# Altium PCB plobot_draft.PcbDoc (part 1 of 2)
Units mil, origin at the board's own origin, x right, y up, seen from the top; angles counter-clockwise.
Board outline 3543.53 x 5236.22 mil, 2 copper layers (Top Layer, Bottom Layer); 119 components, 93 nets, 451 pads, 128 vias.
Unrouted connection lines stored in the file: 83.
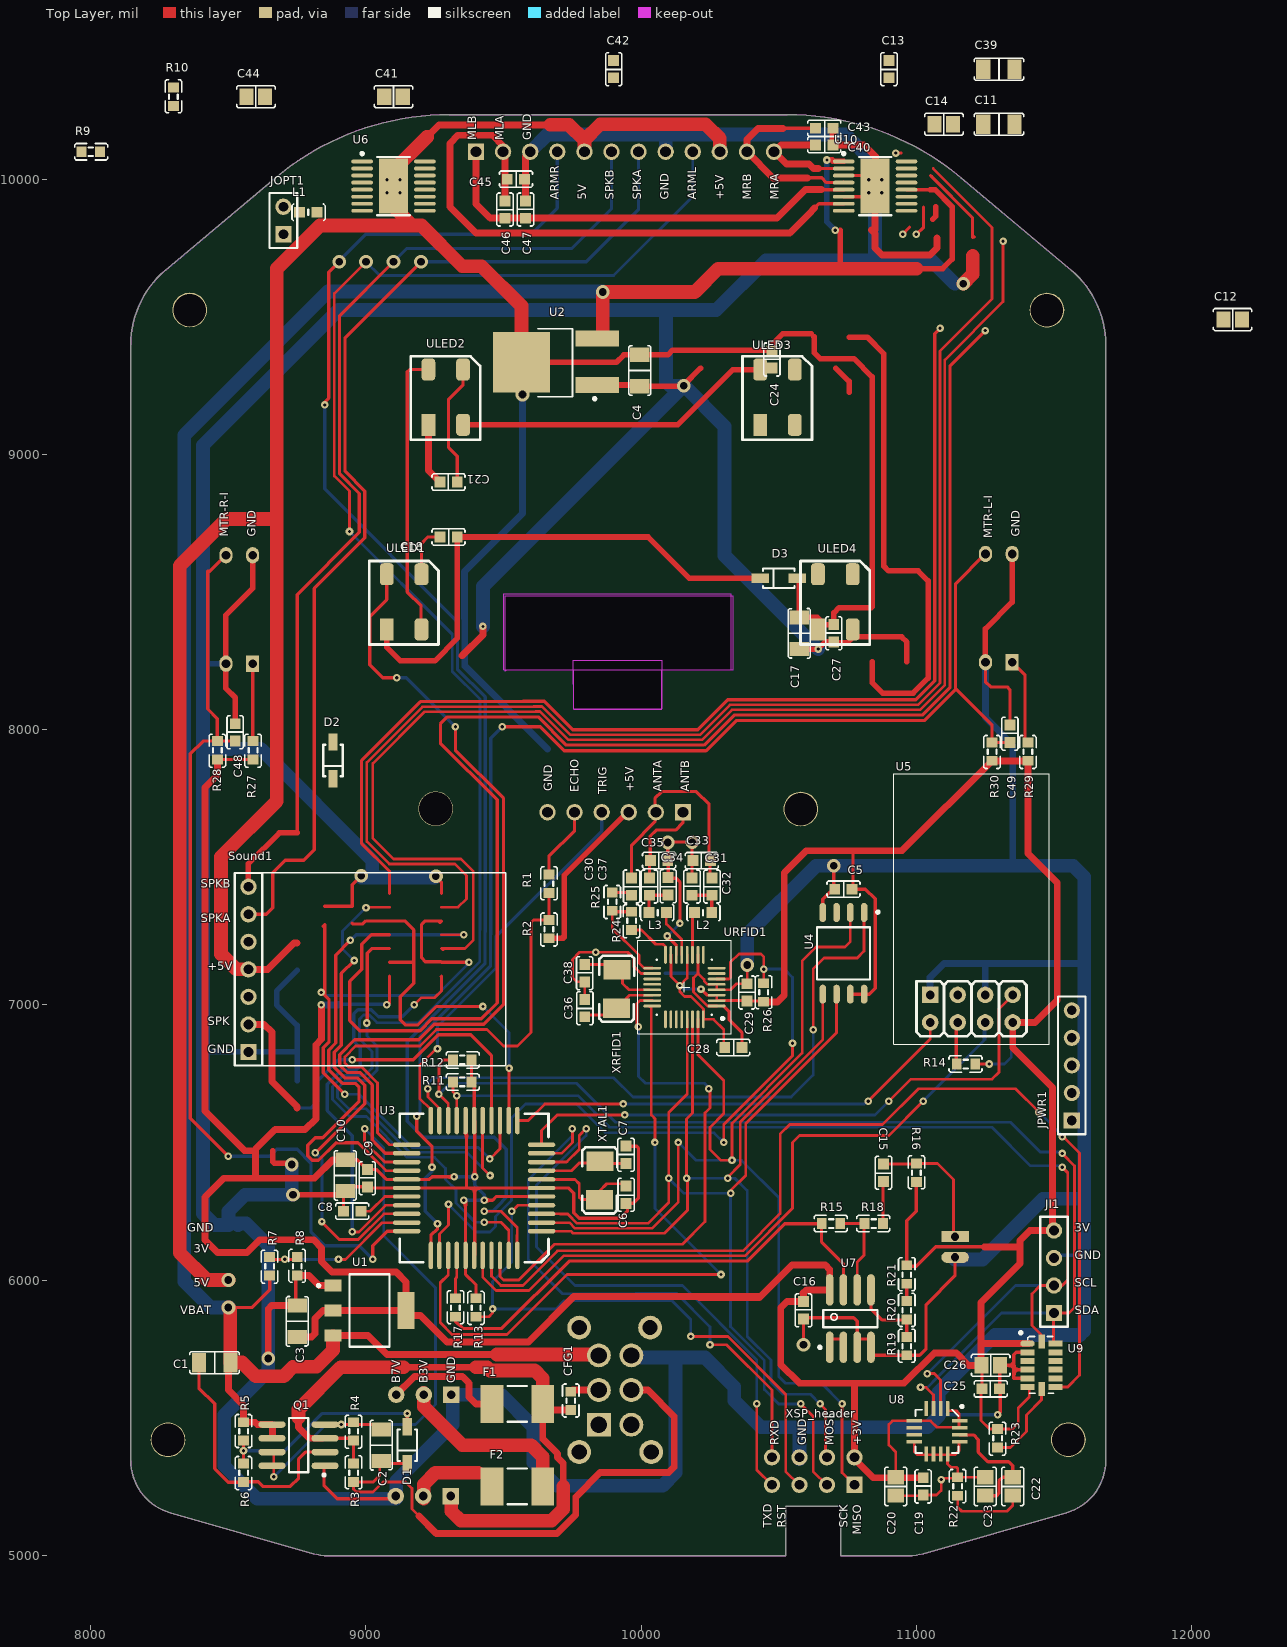
[diagram p0: Top Layer view]
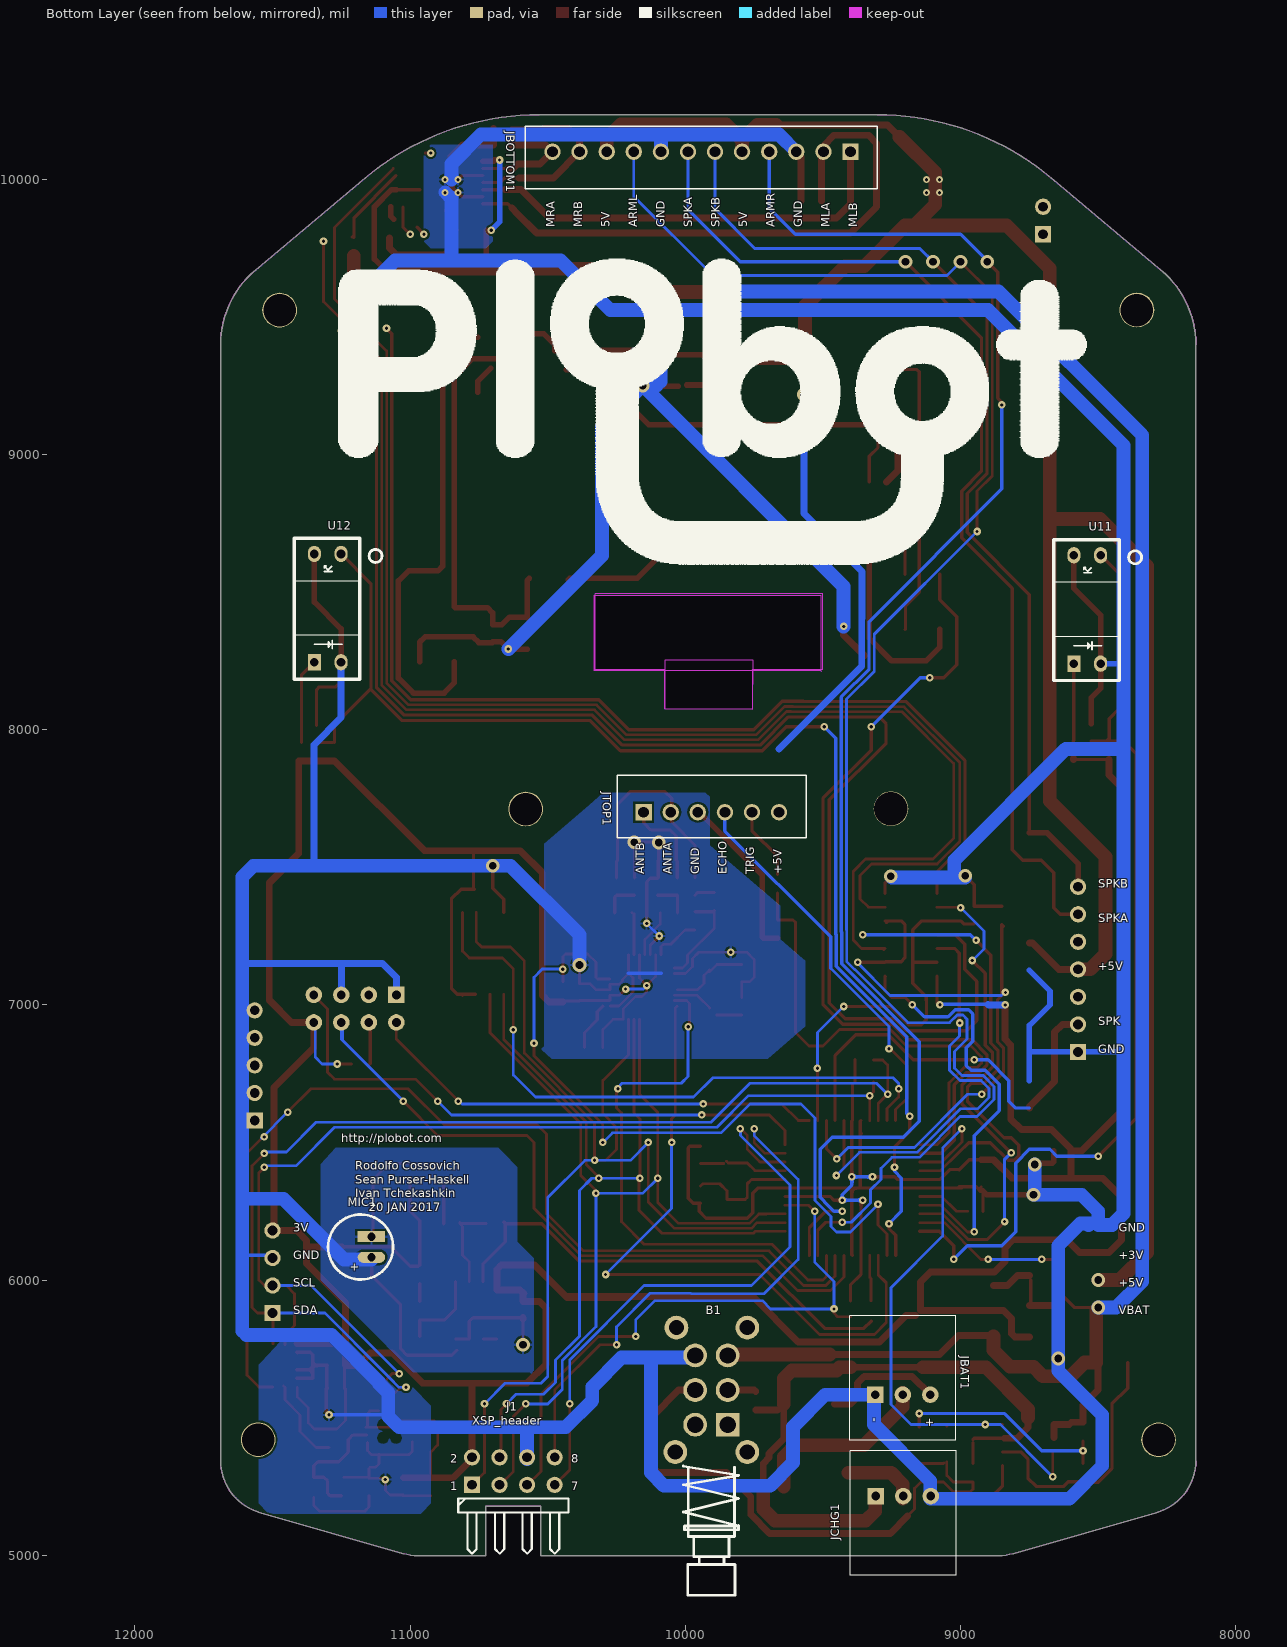
[diagram p1: Bottom Layer view, seen from below]

## Layer stack, top to bottom
Top Layer: signal copper 1.4
Dielectric: dielectric 12.6, FR-4, Dk 4.8
Bottom Layer: signal copper 1.4

## Board outline
8287.99,5154.53 8807.69,5006.05 ccw(c8861.77,5195.33) 8861.77,4998.48 10526,4998.48 10526,5177.5 10725,5177.5 10725,4998.48 10971.98,4998.48 ccw(c10971.98,5195.33) 11026.06,5006.05 11545.76,5154.53 ccw(c11491.68,5343.81) 11688.53,5343.81 11688.53,9398.71 11688.53,9398.7 ccw(c11334.2,9398.7) 11561.96,9670.14 11163.57,10004.43 11163.56,10004.43 ccw(c10530.9,9250.45) 10530.9,10234.7 9302.85,10234.7 ccw(c9302.85,9250.45) 8670.18,10004.43 8271.79,9670.14 ccw(c8499.55,9398.7) 8145.22,9398.7 8145,9398.7 8145,5343.81 8145.22,5343.81 ccw(c8342.07,5343.81)
cut-out: 9754,8253 10075,8253 10075,8075 9755,8074
cut-out: 10332.37,8487.25 10332.37,8215.6 9509.54,8215.6 9505.6,8211.66 9505.6,8487.25

## Design rules (kind name [scope] priority, off if disabled: settings)
Clearance [All] p1: gap=8
FabricationTestpoint [(IsPad And (OnTopLayer Or OnBottomLayer))] p1: side=3 testpointundercomponent=TRUE minsize=40 maxsize=100 preferedsize=60 minholesize=0 maxholesize=40 preferedholesize=32 testpointgrid=1 allowsidetop=TRUE allowsidebottom=TRUE usegrid=TRUE gridtolerance=0.01
HoleSize [All] p1: absolutevalues=TRUE maxlimit=150 minlimit=12 maxpercent=80.000 minpercent=20.000
MinimumSolderMaskSliver [All] p1: minsoldermaskwidth=5
PolygonConnect [All] p1: connectstyle=Relief reliefconductorwidth=10 reliefentries=4 polygonreliefangle="90 Angle"
RoomDefinition audio [InComponentClass('audio')] p1: confinementstyle=ConfineIn formatcopy=TRUE lockcomponents=FALSE outline 11734,5166 11925,5166 11925,5402 11734,5402
RoomDefinition rfid [InComponentClass('rfid')] p2: confinementstyle=ConfineIn formatcopy=TRUE lockcomponents=FALSE outline 7710,4780 12310,4780 12310,10590 7710,10590
RoomDefinition motion [InComponentClass('motion')] p3: confinementstyle=ConfineIn formatcopy=TRUE lockcomponents=FALSE outline 7290,4730 12270,4730 12270,10610 7290,10610
RoomDefinition inout [InComponentClass('inout')] p4: confinementstyle=ConfineIn formatcopy=TRUE lockcomponents=FALSE outline 7340,4790 12250,4790 12250,10510 7340,10510
RoomDefinition cpu [InComponentClass('cpu')] p5: confinementstyle=ConfineIn formatcopy=TRUE lockcomponents=FALSE outline 8210,4575 11590,4575 11590,7880 8210,7880
RoomDefinition connections [InComponentClass('connections')] p6: confinementstyle=ConfineIn formatcopy=TRUE lockcomponents=FALSE outline 8160,4780 11690,4780 11690,10250 8160,10250
RoutingVias [All] p1: holewidth=11.81 width=27.56 viastyle="Through Hole" minholewidth=12 minwidth=24 maxholewidth=28 maxwidth=50
SilkToSilkClearance [All] p1: silktosilkclearance=1
SilkscreenOverComponentPads SilkToSolderMaskClearance [IsPad] p1: minsilkscreentomaskgap=1
SolderMaskExpansion [All] p1: expansion=0
Width [All] p1: maxlimit=1000 minlimit=8 preferedwidth=10
23 further rules are at their usual default settings.

## Classes and differential pairs
component class cpu: C5 C6 C7 C8 C9 C10 J1 R7 R8 R9 R10 R11 R12 R13 R14 R? Sound1 U3 U4 U5 XTAL1
component class rfid: C28 C29 C30 C31 C32 C33 C34 C35 C36 C37 C38 L2 L3 R24 R25 R26 URFID1 XRFID1
component class connections: B1 C1 C2 C3 C4 CFG1 D1 F1 F2 JBAT1 JBOTTOM1 JCHG JCHG1 JI1 Ji2 JOPT1 JPWR1 JTOP JTOP1 Q1 R1 R2 R3 R4 R5 R6 U1 U2
component class motion: B1_1 C11 C12 C13 C14 C40 C43 C45 C46 C47 C48 C49 JSPI R27 R28 R29 R30 U10 U11 U12
component class inout: C17 C18 C19 C20 C21 C22 C23 C24 C25 C26 C27 D3 R22 R23 U8 U9 ULED1 ULED2 ULED3 ULED4 ULED_INNER1 ULED_OUTER2 ULED_OUTER3
component class audio: C15 C16 C39 C41 C42 C44 D2 L1 MIC1 R15 R16 R17 R18 R19 R20 R21 U6 U7

## Components (designator, comment, footprint, x,y, rotation, side; value= is the part's Value field where it differs from the comment)
B1 "PS22F03 non-locked" KGPS22F03 9898.71,5604.03 r0 bottom locked
C1 "10uF" CAPC3216N 8450,5700 r180 top
C2 "1uF" CAPC3216N 9055,5400 r90 top
C3 "10uF" CAPC3216N 8750,5850 r90 top
C4 "10uF" CAPC3216N 9995,9305 r90 top
C5 "100nF" CAPC1608N 10735,7420 r180 top
C6 "18pF" CAPC1608N 9945,6310 r90 top
C7 "18pF" CAPC1608N 9945,6455 r270 top
C8 "100nF" CAPC1608N 8950,6250 r180 top
C9 "100nF" CAPC1608N 9005,6370 r270 top
C10 "10 uF" CAPC3216N 8925,6380 r90 top
C11 "10uF" CAPC3216N 11300,10200 r0 top
C12 "10nF/16V" CAPC2012N 12149,9490 r0 top
C13 "100nF" CAPC1608N 10900,10400 r90 top
C14 "2.2uF" CAPC2012N 11100,10200 r0 top
C15 "100nF" CAPC1608N 10880,6390 r90 top
C16 "100nF" CAPC1608N 10590,5890 r270 top
C17 "10 uF" CAPC3216N 10575,8350 r270 top
C18 "100nF" CAPC1608N 9300,8700 r180 top
C19 "100nF" CAPC1608N 11025,5250 r270 top
C20 "1uF" CAPC2012N 10925,5250 r270 top
C21 "100nF" CAPC1608N 9300,8900 r0 top
C22 "470nF" CAPC2012N 11350,5250 r270 top
C23 "10nF/16V" CAPC2012N 11250,5250 r90 top
C24 "100nF" CAPC1608N 10475,9345 r270 top
C25 "100nF" CAPC1608N 11270,5605 r0 top
C26 "1uF" CAPC2012N 11270,5690 r0 top
C27 "100nF" CAPC1608N 10700,8350 r270 top
C28 "100nF" CAPC1608N 10335,6845 r180 top
C29 "100nF" CAPC1608N 10385,7045 r270 top
C30 "100nF" CAPC1608N 9965,7430 r90 top
C31 "15pF" CAPC1608N 10257,7430 r90 top
C32 "47pF" CAPC1608N 10185,7430 r270 top
C33 "180pF" CAPC1608N 10220,7524 r0 top
C34 "47pF" CAPC1608N 10098,7431 r90 top
C35 "180pF" CAPC1608N 10065,7525 r0 top
C36 "15pF" CAPC1608N 9795,6988 r90 top
C37 "15pF" CAPC1608N 10030,7430 r90 top
C38 "15pF" CAPC1608N 9795,7115 r270 top
C39 "10uF" CAPC3216N 11300,10400 r0 top
C40 "100nF" CAPC1608N 10665,10125 r180 top
C41 "10nF/16V" CAPC2012N 9100,10300 r0 top
C42 "100nF" CAPC1608N 9900,10400 r90 top
C43 "100nF" CAPC1608N 10665,10185 r180 top
C44 "2.2uF" CAPC2012N 8600,10300 r0 top
C45 "100nF" CAPC1608N 9545,10000 r180 top
C46 "100nF" CAPC1608N 9505,9890 r90 top
C47 "100nF" CAPC1608N 9580,9890 r270 top
C48 "100nF" CAPC1608N 8525,7990 r270 top
C49 "100nF" CAPC1608N 11340,7985 r270 top
CFG1 "NC" RESC1608N 9744.09,5561.02 r90 top
D1 "MBR0540" SOD123/X.85 9150,5400 r90 top
D2 "CDZVT2R3.3B" SOD123/X.85 8880,7888 r90 top
D3 "MBR0540" SOD123/X.85 10500,8550 r0 top
F1 "miniSMDC260F/12" miniSMDC260F/12 9550,5550 r0 top
F2 "miniSMDC260F/12" miniSMDC260F/12 9550,5250 r180 top
J1 "XSP" HDR2X4H 10775,5255.85 r180 bottom locked
JBAT1 "Charger" S3B-XH-A(LF)(SN) 9210,5800 r270 bottom locked
JBOTTOM1 "Header 12" JST-B12B-XH 9400,10100 r0 bottom locked
JCHG1 "Charger" "S3B-XH-A( FEMALE )" 9208,4998.48 r90 bottom
JI1 "Header 4" HDR1X4 11500,5880 r90 top
JOPT1 "Header 2" HDR1X2 8700,9800 r90 top
JPWR1 "Component" HDR1X5 11565,6580 r90 top
JTOP1 "w/lock" JST-B6B-XH 10151.73,7700 r180 bottom locked
L1 "Inductor" INDC1608N 8790,9880 r0 top
L2 "2.2uH" INDC1608N 10225,7335 r0 top
L3 "2.2uH" INDC1608N 10060,7335 r180 top
MIC1 "Mic2" electret_6mm 11180,6120 r270 bottom
Q1 "IRF7319" SO-8_L 8755,5400 r180 top
R1 "10k" RESC1608N 9665,7440 r90 top
R2 "10K" RESC1608N 9665,7275 r270 top
R3 "10K" RESC1608N 8955,5300 r90 top
R4 "100K" RESC1608N 8955,5450 r270 top
R5 "100K" RESC1608N 8555,5450 r90 top
R6 "300K" RESC1608N 8555,5300 r270 top
R7 "20k" RESC1608N 8650,6050 r270 top
R8 "10k" RESC1608N 8750,6050 r90 top
R9 "10k" RESC1608N 8000,10100 r0 top
R10 "10k" RESC1608N 8300,10300 r90 top
R11 "10k" RESC1608N 9350,6720 r0 top
R12 "10k" RESC1608N 9350,6800 r0 top
R13 "10k" RESC1608N 9400,5900 r270 top
R14 "10k" RESC1608N 11180,6785 r180 top
R15 "100k" RESC1608N 10690,6205 r180 top
R16 "3.3k" RESC1608N 11000,6390 r90 top
R17 "10k" RESC1608N 9325,5900 r90 top
R18 "22" RESC1608N 10845,6205 r180 top
R19 "10k" RESC1608N 10965,5760 r90 top
R20 "10k" RESC1608N 10965,5890 r90 top
R21 "10k" RESC1608N 10965,6020 r90 top
R22 "10k" RESC1608N 11150,5250 r90 top
R23 "10k" RESC1608N 11295,5425 r270 top
R24 "820" RESC1608N 9965,7305 r270 top
R25 "5.1k" RESC1608N 9895,7375 r270 top
R26 "10k" RESC1608N 10445,7045 r90 top
R27 "1K" RESC1608N 8590,7925 r270 top
R28 "5.1k" RESC1608N 8460,7925 r270 top
R29 "1K" RESC1608N 11405,7920 r270 top
R30 "5.1k" RESC1608N 11275,7920 r270 top
Sound1 "MP3 - M3A3" MP3 8573,6829 r90 top
U1 "AZ1117CH-3.3" SOT223 9000,5900 r180 top
U2 "AZ1084CD-5.0" AZ1084CD-5.0 9675.24,9335 r180 top
U3 "MCU" atmega644p 9355,6345 r270 top locked
U4 "W25Q64BVSIG" W25Q64BVSIG 10730,7190 r270 top
U5 "ESP8266" ESP8266 11141,6986 r90 top
U6 "DRV8833" DRV8833 9100,9975 r0 top
U7 "LM358D" LM358D 10760,5860 r90 top
U8 "L3G4200D" LGA16-4X4 11075,5450 r270 top
U9 "ADXL345BCCZ" ADXL345 11455,5690 r0 top
U10 "DRV8833" DRV8833 10850,9975 r0 top
U11 "ITR9608" ITR9608 8562.62,8409.71 r180 bottom
U12 "ITR9608" ITR9608 11322.62,8414.71 r180 bottom
ULED1 "WS2812B" WS2812B 9141.85,8463.08 r90 top locked
ULED2 "WS2812B" WS2812B 9292.85,9206.86 r90 top locked
ULED3 "WS2812B" WS2812B 10498.44,9206.85 r90 top locked
ULED4 "WS2812B" WS2812B 10708.44,8463.08 r90 top locked
URFID1 "MFRC52202HN1" MFRC52202HN1 10157.13,7064.53 r180 top locked
XRFID1 "7A-27.120MAAJ-T" XTAL 9925,7055 r90 top
XTAL1 "ABM7-8.000MHZ-D2Y-T" XTAL 9863,6359 r90 top

## Footprints (in the part's own frame and the unit in brackets; to place one, negate y for a bottom-side part, rotate by r counter-clockwise, add the part's x,y. Pads: shape width x height; smd on the part's side, far side on the other; paste and mask are expansions set on the pad)
ADXL345 [mm] "BGA, 14-Leads, Body 5.0x3.0mm,  Pitch 0.80mm"
  oct 1.3x0.55 smd: 1(-1.3,2)
  rect 1.3x0.55 smd: 2(-1.3,1.2) 3(-1.3,0.4) 4(-1.3,-0.4) 5(-1.3,-1.2) 6(-1.3,-2) 8(1.3,-2) 9(1.3,-1.2) 10(1.3,-0.4) 11(1.3,0.4) 12(1.3,1.2) 13(1.3,2)
  rect 0.6x1.3 smd: 7(0,-2.2) 14(0,2.2)
  silkscreen extent -2.05,-2.59 1.12,3.12, body extent -1.5,-2.5 1.5,2.5, height 1
atmega644p [mil]
  oval 16x100 smd: 1(167.45,282.95) 2(136.45,282.95) 3(104.45,282.95) 4(73.45,282.95) 5(41.45,282.95) 6(10.45,282.95) 7(-20.55,282.95) 8(-52.55,282.95) 9(-83.55,282.95) 10(-115.55,282.95) 11(-146.55,282.95) 23(-146.55,-207.05) 24(-115.55,-207.05) 25(-83.55,-207.05) 26(-52.55,-207.05) 27(-20.55,-207.05) 28(10.45,-207.05) 29(41.45,-207.05) 30(73.45,-207.05) 31(104.45,-207.05) 32(136.45,-207.05) 33(167.45,-207.05)
  oval 100x16 smd: 12(-234.55,194.95) 13(-234.55,163.95) 14(-234.55,131.95) 15(-234.55,100.95) 16(-234.55,68.95) 17(-234.55,37.95) 18(-234.55,6.95) 19(-234.55,-25.05) 20(-234.55,-56.05) 21(-234.55,-88.05) 22(-234.55,-119.05) 34(255.45,-119.05) 35(255.45,-88.05) 36(255.45,-56.05) 37(255.45,-25.05) 38(255.45,6.95) 39(255.45,37.95) 40(255.45,68.95) 41(255.45,100.95) 42(255.45,131.95) 43(255.45,163.95) 44(255.45,194.95)
  silkscreen extent -260,-232 280,308, body extent -183,-162 227,244, height 39
AZ1084CD-5.0 [mm] "D-PAK, 3-Pads, Body 6.2x6.7mm (max), IPC Low Density"
  rect 4x1.5 smd: 1(-4.2,2.1) 3(-4.2,-2.2)
  rect 5.25x5.6 smd: 2(2.8,0)
  silkscreen extent -4.08,-3.1 1.27,3.49, body extent -3.61,-3.3 2.59,3.3, height 2.38
CAPC1608N [mm]
  rect 1x1 smd: 1(-0.8,0) 2(0.8,0)
  silkscreen extent -1.52,-0.76 1.52,0.75, body extent -0.87,-0.48 0.87,0.48, height 0.85
CAPC2012N [mm]
  rect 1.3x1.5 smd: 1(-0.85,0) 2(0.85,0)
  silkscreen extent -1.78,-1.02 1.78,1.02, body extent -1.1,-0.72 1.1,0.72, height 1.1
CAPC3216N [mm] "Chip Capacitor, Body 3.2x1.6mm, IPC Medium Density"
  rect 1.3x1.8 smd: 1(-1.45,0) 2(1.45,0)
  silkscreen extent -2.29,-1.02 2.29,1.02, body extent -1.7,-0.9 1.7,0.9, height 1.35
DRV8833 [mm]
  oval 2x0.35 smd: 1(-2.9,2.275) 2(-2.9,1.625) 3(-2.9,0.975) 4(-2.9,0.325) 5(-2.9,-0.325) 6(-2.9,-0.975) 7(-2.9,-1.625) 8(-2.9,-2.275) 9(2.9,-2.275) 10(2.9,-1.625) 11(2.9,-0.975) 12(2.9,-0.325) 13(2.9,0.325) 14(2.9,0.975) 15(2.9,1.625) 16(2.9,2.275)
  rect 2.7x5.08 smd: PP(0,0)
  silkscreen extent -3.02,-2.69 1.51,3.12, body extent -2.25,-2.55 2.25,2.55, height 1.2
electret_6mm [mil]
  oval 40x100 hole 30: 1(37.4,39.37)
  rect 40x100 hole 30: 2(-37.4,39.37)
  silkscreen extent -118,-118 118,118
ESP8266 [mil]
  round 60 hole 32: CH_PD(-49.94,-9.12) GPIO0(50.06,-109.12) GPIO2(50.06,-9.12) RST(-49.94,-109.12) RXD(50.06,-209.12) TXD(-49.94,90.88) VCC(-49.94,-209.12)
  rect 60x60 hole 32: GND(50.06,90.88)
  silkscreen extent -130,-341 854,224, body extent -125,-340 845,230, height 164
HDR1X2 [mm] "Connector; Header; 2 Position"
  rect 1.5x1.5 hole 0.9: 1(0,0)
  round 1.5 hole 0.9: 2(2.54,0)
  silkscreen extent -1.27,-1.27 3.81,1.27
HDR1X4 [mm] "Connector; Header; 4 Position"
  rect 1.5x1.5 hole 0.9: 1(0,0)
  round 1.5 hole 0.9: 2(2.54,0) 3(5.08,0) 4(7.62,0)
  silkscreen extent -1.27,-1.27 8.89,1.27, body extent -1.27,-1.27 8.89,1.27, height 4
HDR1X5 [mm] "Connector; Header; 5 Position"
  rect 1.5x1.5 hole 0.9: 1(0,0)
  round 1.5 hole 0.9: 2(2.54,0) 3(5.08,0) 4(7.62,0) 5(10.16,0)
  silkscreen extent -1.27,-1.27 11.43,1.27
HDR2X4H [mm] "Connector; Header; 4x2 Position; Right Angle"
  rect 1.5x1.5 hole 0.9: 1(0,0)
  round 1.5 hole 0.9: 2(0,2.54) 3(2.54,0) 4(2.54,2.54) 5(5.08,0) 6(5.08,2.54) 7(7.62,0) 8(7.62,2.54)
  silkscreen extent -1.27,-6.35 8.89,-1.27, body extent -0.64,-5.94 8.25,3.81, height 5
INDC1608N [mm]
  rect 1x1 smd: 1(-0.8,0) 2(0.8,0)
  silkscreen extent -1.49,-0.76 1.56,0.76, body extent -0.87,-0.48 0.87,0.48, height 0.71
ITR9608 [mm]
  rect 1.2x1.5 hole 0.8: 1(-0.651,-4.316)
  oval 1.2x1.5 hole 0.8: 2(1.816,-4.316) 3(1.816,5.684) 4(-0.651,5.684)
  silkscreen extent -2.5,-5.87 5.6,7.13, body extent -2.42,-5.82 3.58,7.18, height 10
JST-B6B-XH [mm]
  rect 1.508x1.508 hole 1 mask-25.4: 1(0,0)
  round 1.508 hole 1 mask-25.4: 2(2.5,0) 3(5,0) 4(7.5,0) 5(10,0) 6(12.5,0)
  silkscreen extent -2.45,-2.35 15,3.4, body extent -2.27,-2.25 14.75,3.27, height 4
JST-B12B-XH [mm]
  rect 1.508x1.508 hole 1 mask-25.4: 1(0,0)
  round 1.508 hole 1 mask-25.4: 2(2.5,0) 3(5,0) 4(7.5,0) 5(10,0) 6(12.5,0) 7(15,0) 8(17.5,0) 9(20,0) 10(22.5,0) 11(25,0) 12(27.5,0)
  silkscreen extent -2.45,-2.35 30,3.4, body extent -2.27,-2.25 29.75,3.27, height 4
KGPS22F03 [mm]
  round 2.2 hole 1.4: 0(-3.146,-5.666) 0(-3.146,5.814) 0(3.399,-5.666) 0(3.5,5.814)
  rect 2.2x2.2 hole 1.5: 1(-1.334,3.296)
  round 2.2 hole 1.5: 2(-1.334,0.096) 3(-1.334,-3.104) 4(1.666,-3.104) 5(1.666,0.096) 6(1.666,3.296)
  silkscreen extent -2.32,7.12 2.76,19.04, body extent -3.15,-5.7 3.5,19, height 9
LGA16-4X4 [mm]
  rrect50% 1.4x0.325 smd: 1(-2.1,0.975)
  rect 1.4x0.325 smd paste-25.4: 2(-2.1,0.325) 3(-2.1,-0.325) 4(-2.1,-0.975) 9(2.1,-0.975) 10(2.1,-0.325) 11(2.1,0.325) 12(2.1,0.975)
  rect 0.325x1.4 smd paste-25.4: 5(-0.975,-2.1) 6(-0.325,-2.1) 7(0.325,-2.1) 8(0.975,-2.1) 13(0.975,2.1) 14(0.325,2.1) 15(-0.325,2.1) 16(-0.975,2.1)
  silkscreen extent -2.42,-2 2,2.42, body extent -1.5,-1.5 1.5,1.5, height 0.5
LM358D [mm] "SOIC, 8-Leads, Body 5.0x4.0mm (max), Pitch 1.27mm, IPC Low Density"
  oval 2.9x0.7 smd: 1(-2.65,1.905) 2(-2.65,0.635) 3(-2.65,-0.635) 4(-2.65,-1.905) 5(2.65,-1.905) 6(2.65,-0.635) 7(2.65,0.635) 8(2.65,1.905)
  silkscreen extent -2.77,-2.5 0.8,2.93, body extent -2,-2.5 2,2.5, height 1.75
MFRC52202HN1 [mm] "QFN, 32-Leads, Body 5.1x5.1mm (max), Pitch 0.50mm, IPC Low Density"
  oval 1.65x0.25 smd: 1(-2.975,1.75) 2(-2.975,1.25) 3(-2.975,0.75) 4(-2.975,0.25) 5(-2.975,-0.25) 6(-2.975,-0.75) 7(-2.975,-1.25) 8(-2.975,-1.75) 17(2.975,-1.75) 18(2.975,-1.25) 19(2.975,-0.75) 20(2.975,-0.25) 21(2.975,0.25) 22(2.975,0.75) 23(2.975,1.25) 24(2.975,1.75)
  oval 0.25x1.65 smd: 9(-1.75,-2.975) 10(-1.25,-2.975) 11(-0.75,-2.975) 12(-0.25,-2.975) 13(0.25,-2.975) 14(0.75,-2.975) 15(1.25,-2.975) 16(1.75,-2.975) 25(1.75,2.975) 26(1.25,2.975) 27(0.75,2.975) 28(0.25,2.975) 29(-0.25,2.975) 30(-0.75,2.975) 31(-1.25,2.975) 32(-1.75,2.975)
  silkscreen extent -4.3,-4.3 4.3,4.3
miniSMDC260F/12 [mm] "Chip Capacitor, 2-Leads, Body 5.3x3.2mm, IPC Low Density"
  rect 2.1x3.5 smd: 1(-2.35,0) 2(2.35,0)
  silkscreen extent -0.9,-1.65 0.9,1.65, body extent -2.75,-1.71 2.75,1.7, height 1.52
MP3 [mm] "Connector; Header; 7 Position"
  rect 1.5x1.5 hole 0.9: 1(0,0)
  round 1.5 hole 0.9: 2(2.54,0) 3(5.08,0) 4(7.62,0) 5(10.16,0) 6(12.7,0) 7(15.24,0)
  silkscreen extent -1.27,-23.75 16.52,1.27, body extent -1.27,-23.5 16.51,1, height 4.5
RESC1608N [mm]
  rect 0.9x1 smd: 1(-0.85,0) 2(0.85,0)
  silkscreen extent -1.49,-0.76 1.56,0.76, body extent -0.85,-0.48 0.85,0.48, height 0.6
"S3B-XH-A( FEMALE )" [mil]
  rect 60x60 hole 32: 1(216.54,100)
  round 60 hole 32: 2(216.54,0) 3(216.54,-100)
  silkscreen extent -71,-193 382,193, body extent -75,-175 350,175, height 157
S3B-XH-A(LF)(SN) [mil]
  rect 60x60 hole 32: 1(216.54,-100)
  round 60 hole 32: 2(216.54,0) 3(216.54,100)
  silkscreen extent -71,-193 382,193, body extent -75,-175 350,175, height 157
SO-8_L [mm] "SOIC, 8-Leads, Body 4.9x3.9mm, Pitch 1.27mm, IPC High Density"
  oval 2.5x0.6 smd: 1(-2.45,1.905) 2(-2.45,0.635) 3(-2.45,-0.635) 4(-2.45,-1.905) 5(2.45,-1.905) 6(2.45,-0.635) 7(2.45,0.635) 8(2.45,1.905)
  silkscreen extent -2.48,-2.5 0.89,2.88, body extent -2,-2.5 2,2.5, height 1.75
SOD123/X.85 [mm] "SOD-123; 2 Leads; Body 2.7 x 1.6 mm, (LxW)"
  rect 1.6x0.85 smd: 1(-1.7,0) 2(1.7,0)
  silkscreen extent -1.45,-0.9 1.45,0.9, body extent -1.3,-0.56 1.07,0.53, height 0.53
SOT223 [mm]
  rect 1.55x1.1 smd: 1(3.045,-2.031) 2(3.045,0.269) 3(3.045,2.569)
  rect 1.55x3.45 smd: 2(-3.705,0.269)
  silkscreen extent -2.18,-3.08 4.49,3.62, body extent -2.11,-3.01 1.49,3.59, height 4
W25Q64BVSIG [mm]
  oval 1.75x0.6 smd: 1(-3.697,2.033) 2(-3.697,0.763) 3(-3.697,-0.507) 4(-3.697,-1.777) 5(3.839,-1.777) 6(3.839,-0.507) 7(3.839,0.763) 8(3.839,2.033)
  silkscreen extent -3.86,-2.32 2.48,3.43, body extent -2.29,-2.34 2.51,2.52, height 0.8
WS2812B [mil]
  rect 80x50 smd: 1(-99.17,66.06)
  rrect50% 80x50 smd: 2(-99.17,-59.92) 3(101.62,-59.92) 4(101.62,66.06)
  silkscreen extent -154,-122 150,130, body extent -99,-95 98,101, height 30
XTAL [mm]
  rect 1.8x2.5 smd: 1(1.834,0.329) 2(-1.691,0.354)
  silkscreen extent -2.97,-1.27 3.13,1.95, body extent -2.2,-0.89 2.49,1.4, height 2.54

## Part data
B1: library part Component_1
C1 C2 C3 C4 C10 C11 C17 C20 C22 C23 C26 C39: library part Cap_2, "Capacitor"
C5 C6 C7 C8 C9 C12 C13 C14 C15 C16 C18 C19 C21 C24 C25 C27 C28 C29 C30 C31 C32 C33 C34 C35 C36 C37 C38 C40 C41 C42 C43 C44 C45 C46 C47 C48 C49: library part Cap, "Capacitor"
CFG1 R1 R2 R3 R4 R5 R6 R7 R8 R9 R10 R11 R12 R13 R14 R15 R16 R17 R18 R19 R20 R21 R22 R23 R24 R25 R26 R27 R28 R29 R30: library part Res2, "Resistor"
D1 D2 D3: library part Diode, "Default Diode"
F1 F2: library part "Fuse Thermal", "Thermal Fuse"
J1: library part "Header 4X2H", "Header, 4-Pin, Dual row, Right Angle"
JBAT1 JCHG1: library part BATTCON
JBOTTOM1: "Header, 12-Pin"
JI1: "Header, 4-Pin"
JOPT1: "Header, 2-Pin"
JPWR1: library part "Header 5", "Header, 5-Pin"
JTOP1: library part "Header 6", "Header, 6-Pin"
L2 L3: library part Inductor, "Inductor"
MIC1: "Microphone"
Q1: "HEXFET Power MOSFET"
Sound1: library part "Header 7", "Header, 7-Pin"
U1: library part LM1117
U3: library part ATmega644-20AU, "8-bit AVR Microcontroller, 2.7-5.5V, 20MHz, 64KB Flash, 2KB EEPROM, 4KB SRAM, 44-pin TQFP"
U7: "Dual Operational Amplifier"
U8: "L3G4200D Series 2.4 - 3.6 V Three-axis Angular Rate MEMS Motion Sensor - LGA-16"
U9: library part ADXL345
XRFID1: library part Tm08B.S01_12M_42

## Free pads (board coordinates)
  round 125.98 hole 118.11 unplated: 7(8280.6,5419.13) 8(11552.53,5420.01) 9(11474.54,9524.56) 10(8359.1,9524.83) 12(10580.26,7711.48)
  round 125.98 hole 122.05 unplated: 11(9252.95,7712.6)

## Via types
v1: diameter 27.56, hole 12, Top Layer to Bottom Layer, 99 vias
v2: diameter 50, hole 28, Top Layer to Bottom Layer, 20 vias
v3: diameter 25.98, hole 12, Top Layer to Bottom Layer, 8 vias
v4: diameter 27.6, hole 12, Top Layer to Bottom Layer, 1 vias

## Nets (pads, with @x,y where several pads share a name; then routed paths per layer and width w, separated by ;. In a path a pad name is that pad's centre, name@x,y a point inside that pad or via, vN(x,y) a via of type N, cw(c..) or ccw(c..) an arc to the next point about the centre after c; other vN are vias at no path point)
ANT-A: C30.2 C31.2 C33.2 JTOP1.2 | length 827.6
  Top Layer w12: C30.2@9965,7461.5 9965,7565 9965,7580 10050,7665 JTOP1.2@10050,7696.7 ; C31.2@10250,7461.5 10250,7521.5 10246.5,7525 10246.5,7728.5 10200,7775 10075,7775 10050,7750 JTOP1.2@10050,7703.3 ; JTOP1.2@10050,7696.7 JTOP1.2@10050,7703.3 ; JTOP1.2@10050,7696.7 JTOP1.2@10053.3,7700 JTOP1.2@10050,7703.3
ANT-B: C35.1 C37.2 JTOP1.1 | length 325
  Top Layer w12: C37.2@10030,7461.5 C35.1@10030,7521.5 ; C35.1@10033.5,7525 10033.5,7613.5 10055,7635 10125,7635 10151.73,7661.73 JTOP1.1@10151.73,7700
AXL-INT: U9.8 | length 3708.7
  Top Layer w10: 9455.95,6089.55 9455.95,6014.05 9490,5980 9570,5980 9696,6106 10369.67,6106 10505,6241.33 10505,6530 10540,6565 10877.13,6565 11007.13,6695 11360,6695 v1(11445,6610) ; U9.8@11498.31,5611.26 11550,5611.26 11593,5654.26 11593,6462 v1@11540,6515
  Bottom Layer w10: v1(11445,6610) v1@11540,6515
  other v1: 11530,6520
BATT_3.7V: F2.2 JCHG1.2 | length 265.8
  Top Layer w50: JCHG1.2@9210,5206.54 9210,5257 9253,5300 9407.48,5300
BATT_LVL: R7.1 R8.2 U3.32 | length 601.8
  Top Layer w10: R7.1@8641.54,6083.46 R7.1@8650,6075 ; R7.1@8660,6075 v1(8705,6075) R8.2@8751.54,6075 ; v1(8900,6075) 8925.46,6075 9059.01,6208.55 U3.32@9147.95,6208.55
  Bottom Layer w10: v1(8705,6075) v1(8900,6075)
CS_FLASH: U3.21 U4.1 | length 2360.7
  Top Layer w10: v1(9225,6695) 9225,6665 9266.95,6623.05 U3.21@9266.95,6579.55 ; v1(10625,6910) 10625,7130 10665,7170 10785,7170 10810.04,7195.04 U4.1@10810.04,7335.54
  Bottom Layer w10: v1(9225,6695) 9225,6715 9245,6735 9900,6735 9970,6665 10545,6665 10625,6745 v1(10625,6910)
DBG: JPWR1.4 U3.36
ECHO: R1.1 R2.1 U3.23 | length 1806.4
  Top Layer w10: U3.23@9147.95,6491.55 9085.45,6491.55 9041.78,6535.22 9041.78,6716.66 8985.22,6773.22 8938.91,6773.22 8923.22,6788.91 8923.22,6811.09 8962.44,6850.31 9195.75,6850.31 9255.61,6910.17 9439.83,6910.17 9500,6850 9550,6850 9600,6900 9600,7300 9608.46,7308.46 R2.1@9665,7308.46 R1.1@9665,7406.54
GND: B1.4 C3.2 C4.1 C5.2 C6.1 C7.1 C8.2 C9.2 C10.1 C11.1 C12.1 C14.1 C16.2 C17.2 C18.2 C19.2 C20.2 C21.2 C23.2 C24.2 C25.2 C26.2 C27.2 C28.1 C29.1 C32.1 C33.1 C34.2 C35.2 C36.2 C38.2 C39.1 C40.1 C41.1 C43.1 C44.1 C45.1 C47.1 C48.1 C49.1 D2.2 J1.6 JBAT1.1 JBOTTOM1.3 JBOTTOM1.8 JCHG1.1 JI1.1 JPWR1.5 JTOP1.6 MIC1.2 Q1.1 R2.2 R8.1 R9.1 R10.1 R19.1 R22.2 Sound1.1 U1.1 U2.1 U3.6 U3.18 U3.28 U3.39 U4.4 U5.GND U5.GPIO0 U6.3 U6.6 U6.13 U6.PP U7.4 U7.5 U8.8 U8.9 U8.10 U8.11 U8.12 U8.13 U9.2 U9.4 U9.5 U10.3 U10.6 U10.13 U10.PP U11.2 U11.4 U12.2 U12.4 ULED1.3 ULED2.3 ULED3.3 ULED4.3 URFID1.1 URFID1.4 URFID1.5 URFID1.10 URFID1.14 URFID1.18 | length 37026.7
  Top Layer w10: C10.1@8925,6338.5 C10.1@8928.5,6335 ; C36.2@9795,7026.5 C38.2@9795,7083.5 9766.5,7083.5 9750,7100 9750,7165 9776,7191 9951.28,7191 9974.26,7168.02 9974.26,7138.74 9999.26,7113.74 URFID1.18@10040,7113.74 ; URFID1.14@10127.6,7181.65 10127.6,7217.4 ; URFID1.10@10206.34,7181.65 10206.34,7114.53 10190,7098.19 10190,7046.66 10241.03,6995.63 URFID1.1@10274.25,6995.63 ; 10206.73,7114.13 10228.77,7092.09 10228.77,7086.63 10241.03,7074.37 URFID1.5@10274.25,7074.37 URFID1.4@10274.25,7054.69 10325,7054.69 10346.81,7076.5 C29.1@10385,7076.5 v2(10385,7145) ; C20.2@10925,5216.54 C19.2@11028.46,5216.54 ; U8.8@10992.32,5411.61 10992.32,5377.68 11005,5365 11087.8,5365 U8.12@11113.39,5365 ; C19.2@11025,5218.5 11073.5,5218.5 11090,5235 11090,5270 11100,5280 R22.2@11150,5280 ; U8.12@11113.39,5367.32 U8.12@11113.39,5365 ; U8.13@11155,5410 11155,5380 11140,5365 U8.12@11113.39,5365 ; C23.2@11241.54,5283.46 R22.2@11150,5283.46 11150,5315 11145,5320 11125,5320 11113.39,5331.61 U8.12@11113.39,5365
  Top Layer w12: C3.2@8745,5905 8745,5907.09 R8.1@8745,6000 ; Q1.1@8847.52,5325 8847.52,5252.48 8895,5205 9110,5205 ; 8850,7358.46 8950,7358.46 8950,7436 v2(8983,7469) ; C8.2@8918.5,6250 C10.1@8918.5,6322.91 ; C10.1@8926.46,6321.46 8943.5,6338.5 C9.2@9005,6338.5 ; C9.2@8995.45,6334.55 U3.28@9147.95,6334.55 9215,6334.55 9365,6334.55 ; ULED1.3@9201.77,8564.69 9201.77,8673.23 9200,8675 9225,8700 C18.2@9268.5,8700 ; v2@9252.54,7465.54 9274.49,7443.58 9274.49,7405 ; C21.2@9331.5,8900 9331.5,8993.5 9300,9025 9300,9200 9352.77,9252.77 ULED2.3@9352.77,9308.47 ; U3.18@9361.95,6579.55 9365,6576.5 9365,6334.55 ; U3.39@9392.95,6089.55 9395,6091.6 9395,6334.55 ; C7.1@9945,6486.5 9983.5,6486.5 9990,6480 9990,6297.01 9971.5,6278.5 C6.1@9945,6278.5 9950,6273.5 9950,6250 9925,6225 9775,6225 9755,6245 9755,6285.04 9755,6315 9735.45,6334.55 U3.6@9637.95,6334.55 9395,6334.55 ; v1(10095,7250) 10127.6,7217.4 ; C34.2@10100,7461.5 C34.2@10100,7462.5 ; v1(10140.81,7295.81) 10140.81,7419.69 10140.81,7446.72 10127.53,7460 10100.5,7460 C34.2@10098,7462.5 10098,7523.5 C35.2@10096.5,7525 v2(10096.5,7590.24) 10095,7591.73 10185,7591.73 C32.1@10185,7461.5 C32.1@10183.5,7462.99 ; URFID1.1@10300,6995 10320,6975 10320,6950 10320,6945 10366.5,6898.5 C28.1@10366.5,6845 ; v2(10590,5765) C16.2@10590,5858.5 ; C16.2@10590,5863.26 10771.74,5863.26 10785,5850 10785,5785.67 U7.4@10835,5785.67 ; U4.4@10660.04,7335.54 10660.04,7383.54 10700,7423.5 v2(10700,7505) ; U10.6@10735.83,9936.61 10811.61,9936.61 U10.PP@10850,9975 10811.61,10013.39 U10.3@10735.83,10013.39 ; U7.4@10830,5745 10848.46,5726.54 R19.1@10965,5726.54 11011.54,5726.54 11035,5750 11035,5910 11140,6015 11140,6080 ; U10.PP@10870,9885 U10.PP@10870.43,9885.43 ; U12.2@11251.12,8244.77 11251.12,8173.88 11270,8155 11330,8155 11340,8145 C49.1@11340,8016.5 ; C25.2@11300,5610 11303.25,5606.75 11305,5605 11305,5520 ; C26.2@11300,5690 C26.2@11303.46,5690 ; C25.2@11301.5,5605 11303.46,5606.97 C26.2@11303.46,5690 ; U9.2@11409.45,5735 11411.69,5737.24 11362.24,5737.24 11354.25,5729.25 11354.25,5690 ; U9.5@11411.69,5642.76 11354.25,5642.76 11354.25,5674.25 ; U9.4@11411.69,5674.25 11354.25,5674.25 ; 9365,6334.55 9395,6334.55 ; C26.2@11303.46,5690 11354.25,5690 ; 11354.25,5674.25 11354.25,5690
  Top Layer w20: C48.1@8525,8021.5 8525,8116.12 8491.12,8150 U11.2@8491.12,8239.77 8491.12,8416.12 8588.25,8513.25 U11.4@8588.25,8633.47 ; 8661.5,6470 8661.5,6429.5 8666.24,6424.76 8725.24,6424.76 v2(8730,6420) ; v2(8735,6310) 8905,6310 C10.1@8920,6325 ; R2.2@9665,7241.54 9716.54,7241.54 9720,7245 ; 9715,7245 9720,7250 9720,7470 9940,7690 9940,7700 9940.39,7700.39 9945,7705 ; U2.1@9860.35,9252.32 C4.1@9995,9252.32 ; C4.1@10025,9247.91 v2@10150,9247.91 ; v2@10153.54,9251.46 10215.59,9313.5 ; C17.2@10575,8292.91 v1(10643.07,8292.91) 10670.16,8320 10698.5,8320 C27.2@10700,8318.5 10702.5,8316 10750,8316 10771,8337 10946,8337 10965.21,8317.79 10965.21,8245.79 ; 10706.75,9313.5 10755.21,9265.04 10755.21,9225.79 ; U12.2@11251.12,8244.77 11251.12,8366.12 11348.25,8463.25 U12.4@11348.25,8635.22
  Top Layer w25: v2(8645,5715) 8645,5895 8657.09,5907.09 8745,5907.09 C3.2@8750,5907.09 ; R8.1@8750,6016.54 8793.46,6016.54 8830,5980 U1.1@8880,5980 ; 9349.5,8268.5 9425,8344 v1(9425,8375) ; C47.1@9580,9921.5 9580,10083.15 JBOTTOM1.3@9596.85,10100 ; C16.2@10590,5858.5 C16.2@10590,5863.26 ; C43.1@10696.5,10185 C40.1@10696.5,10125 10810,10125 10851.5,10083.5 10851.5,10002.52 10850,10001.02 U10.PP@10850,9975 10850,9951.38 10850,9905 10850,9815 ; 10837.09,9815 10850,9802.09 10850,9750 10875,9725 11050,9725 11075,9750 11075,9786.54
  Top Layer w50: v2(11170,9620) 11205,9655 11205,9721.54
  Bottom Layer w10: v1(10095,7250) v1(10140.81,7295.81)
  Bottom Layer w12: 10087.13,7114.53 10137.13,7114.53 10207.13,7114.53 ; v2(10590,5765) v2@10605,5765 ; U5.GND@11045,7030 U5.GND@11045,7036.06 ; 11085,5510 v1(11295,5510) ; U5.GPIO0@11240,7025 U5.GPIO0@11245,7020 ; 11500,6090 11590,6090
  Bottom Layer w20: 8408.22,8240 U11.2@8491.12,8240 ; 8413.22,6829 Sound1.1@8573,6829 8746,6829 8750,6825 ; 8750,6725 8750,6825 ; 8750,7125 8675,7050 8675,7000 8750,6925 8750,6825
  Bottom Layer w25: U5.GND@11050.12,7036.06 11050.12,7100.12 11100,7150 11610,7150 ; U5.GPIO0@11250.12,7036.06 11250.12,7149.88 ; U12.2@11251.12,8244.77 11251.12,8043.88 11350,7945 11350,7505
  Bottom Layer w50: 8535,6200 8530,6205 8565,6205 8645,6125 v2(8645,5715) 8645,5670 8485,5510 8485,5325 8605,5205 9110,5205 ; v2@8730,6315 v2(8730,6420) ; v2(8735,6310) 8560,6310 8500,6250 8500,6200 8450,6200 8408.22,6241.78 8408.22,7930 ; v2@8983,7463 v2@9250,7463 ; 9022.56,7482.44 9022.56,7525.44 8618,7930 8408.22,7930 ; 9110,5206.54 9110,5270 9315,5475 JBAT1.1@9315,5583.46 ; JBAT1.1@9310,5583.46 JBAT1.1@9315,5583.46 ; JBAT1.1@9315,5585 JBAT1.1@9315,5583.46 ; v1(9425,8375) 9425,8520 v2(10155,9250) ; JBOTTOM1.3@9596.85,10100 9659.54,10162.69 10743.27,10162.69 10850,10055.95 10850,9998.62 ; B1.4@9964.31,5726.22 9972.31,5718.22 10125,5718.22 ; JBOTTOM1.8@10088.98,10100 10088.98,10158.66 ; 10090,9265 10090,9525 ; 10105,9250 v2(10155,9250) ; v2(10385,7145) 10385,7255 10635,7505 v2(10700,7505) 11350,7505 11570,7505 11610,7465 11610,7150 11610,6295 ; J1.6@10575,5350 J1.6@10575,5355.85 10575,5465 ; v1(10643.07,8292.91) 10303.15,8632.84 10303.15,9101.85 v2(10155,9250) ; v3@10872.5,9952.5 10850,9930 10850,9705 ; 11113,5624.26 11080,5591.26 11080,5505 11040,5465 10575,5465 ; 11113,5628 11285,5800 11595,5800 ; 11140,9620 11055,9705 10850,9705 ; 11140.63,6075 11240,6075 11460,6295 11610,6295 ; 11610,5815 11610,6295 ; 8408.22,7930 8408.22,8240 8408.22,9033.22 8900,9525 10090,9525 ; JBAT1.1@9315,5583.46 9491.54,5583.46 9608.56,5466.44 9608.56,5336.44 9692.83,5252.17 10077.17,5252.17 10125,5300 10125,5718.22 ; 10090,9525 10273,9525 10453,9705 10850,9705 ; 10125,5718.22 10231.78,5718.22 10338.07,5611.93 10338.07,5561.93 10435,5465 10575,5465
  other v1: 11090,5275 9835,7191
  other v2: 9254,7467 10185.99,7590.96
  other v3: 10826.38,9951.38 10873.62,9951.38 10826.38,9998.62 10873.62,9998.62
LEDS: U3.24 ULED1.4 | length 3043.7
  Top Layer w12: ULED1.4@9075.79,8564.69 9075.79,8472.54 9014.12,8410.88 9014.12,8235.88 9061,8189 v1(9112,8189) ; U3.24@9147.95,6460.55 9069.45,6460.55 9022.78,6507.22 9022.78,6708.79 8977.35,6754.22 8931.04,6754.22 8904.22,6781.04 8904.22,6818.96 8958.26,6873 9191.57,6873 9247.74,6929.17 9427.74,6929.17 9500,7001.43 9500,7750 9325,7925 v1(9325,8010)
  Bottom Layer w12: v1(9112,8189) 9146,8189 v1(9325,8010)
MIC: D2.1 R17.2 U3.37 | length 183.2
  Top Layer w10: R17.2@9325,5925 R17.2@9325,5933.46 9325,5975 ; 9325,5958.46 9325,5975 ; 9329.95,6025 U3.37@9329.95,6089.55 ; 9330,6025 9330,6010 9325,6005 9325,5975
MISO: J1.1 U3.2 U4.2 URFID1.31 | length 4224.3
  Top Layer w10: U3.2@9637.95,6208.55 9739.12,6208.55 9759.67,6188 10040,6188 10135,6283 v1(10135,6500) ; URFID1.31@10206.34,6947.4 10206.34,6818.66 10300,6725 10300,6605 10250,6555 10250,6475 10290,6435 v1(10330,6435) 10330,6569.54 10585,6824.54 10585,7160 10635,7210 10740,7210 10760.04,7230.04 U4.2@10760.04,7335.54 ; v1(10730,5550) 10730,5300 J1.1@10775,5255
  Bottom Layer w10: v1(10135,6500) 10200,6435 v1(10330,6435) 10365,6435 10500,6300 10500,5650 10525,5625 10655,5625 v1(10730,5550) ; J1.1@10775,5245 J1.1@10775,5255.85
MOSI: J1.4 U3.1 U4.5 URFID1.30 | length 3458.9
  Top Layer w10: U3.1@9637.95,6177.55 9695,6177.55 9744.67,6177.55 9752.22,6170 10084.46,6170 10168,6253.54 10168,6367 v1(10165,6370) 10165,6585 10186.65,6606.65 URFID1.30@10186.65,6947.4 ; v1@10315,6375 10360,6420 10360,6574.09 10660.04,6874.13 U4.5@10660.04,7038.85 ; v1(10650,5550) 10670,5530 J1.4@10670,5360
  Bottom Layer w10: v1(10165,6370) v1(10315,6370) 10340,6370 10385,6325 10385,5795.91 10472.08,5708.83 10472.08,5627.92 10515,5585 10615,5585 v1(10650,5550)
MTR-L-A: U3.13 U10.16 | length 1470.2
  Top Layer w10: U3.13@9518.95,6579.55 9520,6580.6 v1(9520,6770)
  Top Layer w12: 8949.53,7296 8951.53,7294 8989,7294 9000,7305 9085.51,7305 9141,7305 9174,7272 9174,7155 ; 9085.51,7155 9174,7155 ; v1(9425,6994) 9256,6994 9189,6927 9142,6927 9124,6945 9124,7016 9125,7017 9125,7030 9174,7079 9174,7155
  Bottom Layer w10: v1(9425,6994) 9520,6899 v1(9520,6770)
MTR-L-B: U3.14 U10.15 | length 2463.4
  Top Layer w10: v1(9450,6440) 9486.95,6476.95 U3.14@9486.95,6579.55
  Top Layer w12: 8844.46,7286 8850,7291.54 8850,7034 8865.78,7018.22 8865.78,6865.37 8844.22,6843.81 8844.22,6753.78 v1(8923,6675) ; 9268.49,7299 9274.49,7305 9215,7305 9202,7292 9202,7290 9202,7170.43 9215.43,7157 9272.49,7157 9274.49,7155 v1(9374,7155)
  Bottom Layer w10: v1@8838,7047 8851,7034 8958,7034 ; v1(8923,6675) 8975,6675 9168,6482 9408,6482 v1(9450,6440) ; 8925,7034 8958,7034 ; v1@9375.5,7153.5 9256,7034 8958,7034
  other v1: 8837,7045
MTR-L-I: C49.2 R30.1 U3.34 U12.3 | length 4705.1
  Top Layer w12: v1(9185,6595) 9185,6540 9240,6485 v1(9240,6410) ; U3.34@9235.95,6089.55 9235.95,6162.82 9260,6186.87 v1(9260,6205) ; v1(9495,8010) 9633.17,8010 9720.17,7923 10235.83,7923 10345.83,8033 11029.28,8033 11142.46,8146.17 11142.46,8149 ; U12.3@11251.12,8638.47 11142.46,8529.8 11142.46,8149 ; R30.1@11275,7953.46 11275,8016.46 11142.46,8149 ; R30.1@11280.04,7953.5 C49.2@11340,7953.5
  Bottom Layer w12: 9195,6605 9196,6606 9196,6883.97 9452.22,7140.19 9452.22,7255.5 9453.22,7256.5 9453.22,7968.22 v1(9495,8010) ; 9240,6395 9215,6370 9215,6250 v1(9260,6205)
MTR-L-OA: C13.2 C40.2 JBOTTOM1.12 U10.2 | length 454.6
  Top Layer w12: 10645,10038.98 U10.2@10735.83,10038.98
  Top Layer w25: 10565,10055 10550,10055 ; C40.2@10633.5,10125 10507.68,10125 JBOTTOM1.12@10482.68,10100 10527.68,10055 10550,10055 ; 10645,10038.98 10626.02,10038.98 10610,10055 10550,10055
MTR-L-OB: C13.1 C43.2 JBOTTOM1.11 U10.4 | length 709.7
  Top Layer w12: 10515,10185 10530,10185 10565,10185 C43.2@10633.5,10185 ; 10605,10005 10656,10005 10673.2,9987.8 U10.4@10735.83,9987.8 U10.4@10734.92,9988.7
  Top Layer w25: 10515,10185 10425,10185 10384.25,10144.25 JBOTTOM1.11@10384.25,10100 10479.25,10005 10605,10005
MTR-R-A: U3.15 U10.9 | length 1127.8
  Top Layer w12: v1(8950,6800) 9172.31,6800 9263.48,6891.17 9380.83,6891.17 9455.95,6816.05 U3.15@9455.95,6579.55
  Bottom Layer w12: 8750,6625 8800,6625 8825,6650 8825,6725 8900,6800 v1(8950,6800)
MTR-R-B: U3.16 U10.10 | length 1605.7
  Top Layer w10: U3.16@9423.95,6579.55 9423.22,6578.82 9423.22,6407.78 v1(9451,6380)
  Top Layer w12: v1@9004.78,6945.78 9004.78,7187.78 9022,7205 9085.51,7205
  Bottom Layer w10: v1(9003,6934) 9004,6935 9004,6886.46 9039.78,6850.68 9039.78,6762.45 9002.33,6725 8925,6725 8896.22,6696.22 8896.22,6663.91 8938.13,6622 9001,6622 9159,6464 9367,6464 v1(9451,6380)
MTR-R-I: C48.2 R28.1 U3.33 U11.3 | length 3462.1
  Top Layer w12: R28.1@8465,7963.46 8470,7958.46 8470.04,7958.5 C48.2@8525,7958.5 ; U11.3@8491.12,8633.47 8432.65,8575 8425,8575 8425,8075 8460,8040 R28.1@8460,7958.46 8408.46,7958.46 8362,7912 8362,6588 v1(8500,6450) ; v1(9025,6075) 9025,6125 9077.55,6177.55 U3.33@9147.95,6177.55
  Bottom Layer w12: v1(8500,6450) 8650,6450 8675,6475 8750,6475 8800,6425 8800,6175 8850,6125 8975,6125 v1(9025,6075)